# Altium PCB 8 BIT MCU CARD.PcbDoc
Units mm, origin at the board's own origin, x right, y up, seen from the top; angles counter-clockwise.
Board outline 152.4 x 101.6 mm, 2 copper layers (Top Layer, Bottom Layer); 24 components, 88 nets, 222 pads, 0 vias.
Unrouted connection lines stored in the file: 121.
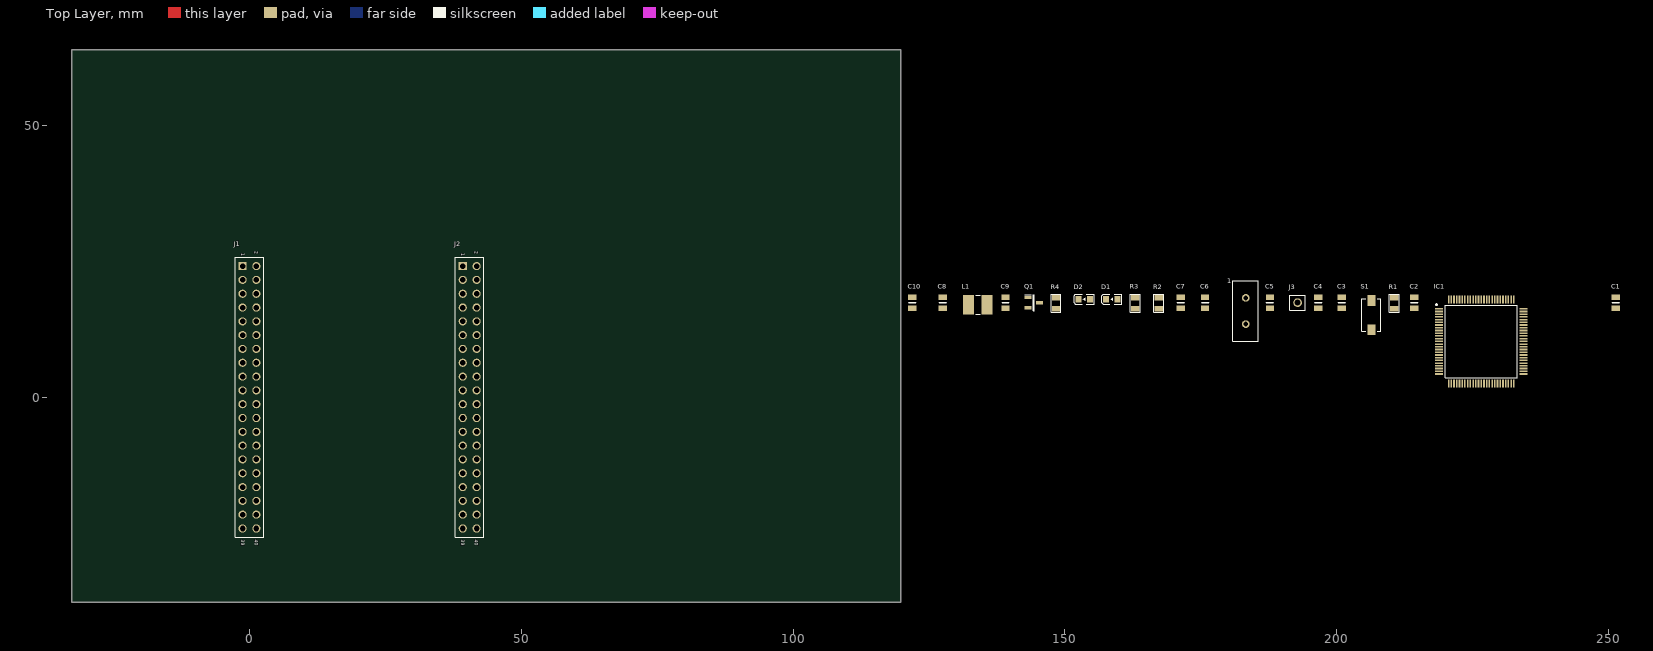
[diagram p0: Top Layer view]
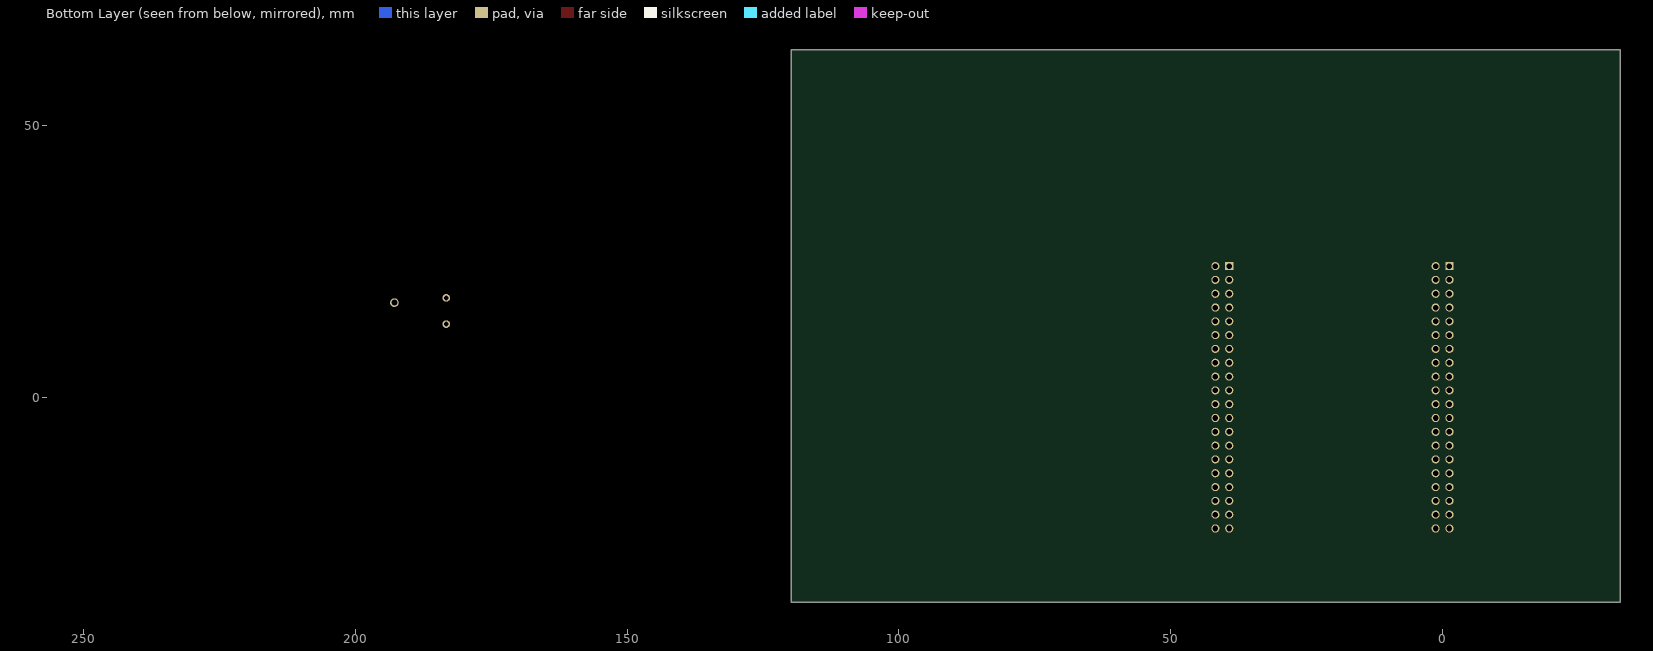
[diagram p1: Bottom Layer view, seen from below]

## Layer stack, top to bottom
Top Solder: solder mask 0.0102, Solder Resist, Dk 3.5
Top Layer: signal copper 0.0356
Dielectric 1: dielectric 0.32, FR-4, Dk 4.8
Bottom Layer: signal copper 0.0356
Bottom Solder: solder mask 0.0102, Solder Resist, Dk 3.5

## Board outline
-32.639,-37.719 119.761,-37.719 119.761,63.881 -32.639,63.881

## Design rules (kind name [scope] priority, off if disabled: settings)
Clearance [All] p1: gap=0.254 ignorepadtopadclearanceinfootprint=FALSE except(0: Arc-Hole Track-Hole SMDPad-Hole THPad-Hole Via-Hole Fill-Hole Poly-Hole Region-Hole Text-Hole)
PolygonConnect [All] p1: connectstyle=Relief reliefconductorwidth=0.254 reliefentries=4 polygonreliefangle="90 Angle" airgapwidth=0.254
RoomDefinition PIC18F97J94 [InComponentClass('PIC18F97J94')] p1: confinementstyle=ConfineIn formatcopy=TRUE lockcomponents=FALSE outline 120.904,-36.195 253.238,-36.195 253.238,21.717 120.904,21.717
RoutingVias [All] p1: holewidth=0.711 width=1.27 viastyle="Through Hole" minholewidth=0.711 minwidth=1.27 maxholewidth=0.711 maxwidth=1.27
SolderMaskExpansion [All] p1: expansion=0.102 istentingtop=FALSE
Width [All] p1: maxlimit=0.254 minlimit=0.254 preferedwidth=0.254
30 further rules are at their usual default settings.

## Components (designator, comment, footprint, x,y, rotation, side; value= is the part's Value field where it differs from the comment)
1 "" "Mini Crystal" 179.324,15.875 r90 top
C1 "0.10µF" SMD-0805C 251.333,17.399 r0 top
C2 "0.10µF" SMD-0805C 214.249,17.399 r0 top
C3 "10uF" SMD-0805C 200.914,17.399 r0 top value=0.10µF
C4 "0.10µF" SMD-0805C 196.596,17.399 r0 top
C5 "0.10µF" SMD-0805C 187.706,17.399 r0 top
C6 "18pF" SMD-0805C 175.768,17.399 r0 top value=0.10µF
C7 "18pF" SMD-0805C 171.323,17.399 r0 top value=0.10µF
C8 "0.10µF" SMD-0805C 127.508,17.399 r0 top
C9 "0.10µF" SMD-0805C 139.065,17.399 r0 top
C10 "0.10µF" SMD-0805C 121.92,17.399 r0 top
D1 "150080BS75000" WL-SMCW_0805 158.623,18.034 r0 top
D2 "150080BS75000" WL-SMCW_0805 153.543,18.034 r0 top
IC1 "PIC18F97J94-I-PF" QFP50P1600X1600X120-100N 226.568,10.287 r0 top
J1 "61304021821" 61304021821 0,0 r270 top
J2 "61304021821" 61304021821 40.513,0 r270 top
J3 "61300111121" 61300111121 192.786,17.399 r0 top
L1 "10uH, 0.95A" WE-LQ_1812 133.985,17.018 r0 top
Q1 "S12302DS Nchanel SMD SOT-23" SOT-23-3N 144.272,17.399 r0 top
R1 "10K" SMD-0805-RES 210.566,17.272 r0 top value=1k
R2 "240 ohm" SMD-0805-RES 167.259,17.272 r0 top value=1k
R3 "1k" SMD-0805-RES 162.941,17.272 r0 top
R4 "1k" SMD-0805-RES 148.336,17.272 r0 top
S1 "434113043826" 434113043826 206.375,15.113 r90 top

## Footprints (in the part's own frame and the unit in brackets; to place one, negate y for a bottom-side part, rotate by r counter-clockwise, add the part's x,y. Pads: shape width x height; smd on the part's side, far side on the other; paste and mask are expansions set on the pad)
61300111121 [mm] "Pin Header, pitch 2.54 mm, THT, Vertical, single row, 1p"
  round 1.6 hole 1.1: 1(0,0)
  silkscreen extent -1.42,-1.35 1.42,1.35, body extent -1.27,-1.27 1.27,1.27, height 8.57
61304021821 [mm] "Socket Header, Pitch 2.54 mm, THT, Vertical, dual row, 40p"
  rect 1.5x1.5 hole 1.02: 1(-24.13,-1.27)
  round 1.5 hole 1.02: 2(-24.13,1.27) 3(-21.59,-1.27) 4(-21.59,1.27) 5(-19.05,-1.27) 6(-19.05,1.27) 7(-16.51,-1.27) 8(-16.51,1.27) 9(-13.97,-1.27) 10(-13.97,1.27) 11(-11.43,-1.27) 12(-11.43,1.27) 13(-8.89,-1.27) 14(-8.89,1.27) 15(-6.35,-1.27) 16(-6.35,1.27) 17(-3.81,-1.27) 18(-3.81,1.27) 19(-1.27,-1.27) 20(-1.27,1.27) 21(1.27,-1.27) 22(1.27,1.27) 23(3.81,-1.27) 24(3.81,1.27) 25(6.35,-1.27) 26(6.35,1.27) 27(8.89,-1.27) 28(8.89,1.27) 29(11.43,-1.27) 30(11.43,1.27) 31(13.97,-1.27) 32(13.97,1.27) 33(16.51,-1.27) 34(16.51,1.27) 35(19.05,-1.27) 36(19.05,1.27) 37(21.59,-1.27) 38(21.59,1.27) 39(24.13,-1.27) 40(24.13,1.27)
  silkscreen extent -25.78,-2.62 25.78,2.62, body extent -25.65,-2.54 25.65,2.54, height 8.45
434113043826 [mm] "SMD Tact Switch, body 6x3.5mm"
  rect 2x1.5 smd: 1(-2.7,0) 2(2.7,0)
  silkscreen extent -3,-1.75 3,1.75, body extent -3.65,-1.75 3.65,1.75, height 4.3
"Mini Crystal" [mm] "THD, 2-Leads, Body 4x10mm, Pitch 5mm"
  round 1.4 hole 0.9: 1(-2.413,-3.937) 2(2.413,-3.937)
  silkscreen extent -5.59,-6.22 5.59,-1.52, body extent -5.61,-6.24 5.59,-1.64, height 3.75
QFP50P1600X1600X120-100N [mm]
  rect 1.475x0.3 smd: 1(-7.738,6) 2(-7.738,5.5) 3(-7.738,5) 4(-7.738,4.5) 5(-7.738,4) 6(-7.738,3.5) 7(-7.738,3) 8(-7.738,2.5) 9(-7.738,2) 10(-7.738,1.5) 11(-7.738,1) 12(-7.738,0.5) 13(-7.738,0) 14(-7.738,-0.5) 15(-7.738,-1) 16(-7.738,-1.5) 17(-7.738,-2) 18(-7.738,-2.5) 19(-7.738,-3) 20(-7.738,-3.5) 21(-7.738,-4) 22(-7.738,-4.5) 23(-7.738,-5) 24(-7.738,-5.5) 25(-7.738,-6) 51(7.738,-6) 52(7.738,-5.5) 53(7.738,-5) 54(7.738,-4.5) 55(7.738,-4) 56(7.738,-3.5) 57(7.738,-3) 58(7.738,-2.5) 59(7.738,-2) 60(7.738,-1.5) 61(7.738,-1) 62(7.738,-0.5) 63(7.738,0) 64(7.738,0.5) 65(7.738,1) 66(7.738,1.5) 67(7.738,2) 68(7.738,2.5) 69(7.738,3) 70(7.738,3.5) 71(7.738,4) 72(7.738,4.5) 73(7.738,5) 74(7.738,5.5) 75(7.738,6)
  rect 0.3x1.475 smd: 26(-6,-7.738) 27(-5.5,-7.738) 28(-5,-7.738) 29(-4.5,-7.738) 30(-4,-7.738) 31(-3.5,-7.738) 32(-3,-7.738) 33(-2.5,-7.738) 34(-2,-7.738) 35(-1.5,-7.738) 36(-1,-7.738) 37(-0.5,-7.738) 38(0,-7.738) 39(0.5,-7.738) 40(1,-7.738) 41(1.5,-7.738) 42(2,-7.738) 43(2.5,-7.738) 44(3,-7.738) 45(3.5,-7.738) 46(4,-7.738) 47(4.5,-7.738) 48(5,-7.738) 49(5.5,-7.738) 50(6,-7.738) 76(6,7.738) 77(5.5,7.738) 78(5,7.738) 79(4.5,7.738) 80(4,7.738) 81(3.5,7.738) 82(3,7.738) 83(2.5,7.738) 84(2,7.738) 85(1.5,7.738) 86(1,7.738) 87(0.5,7.738) 88(0,7.738) 89(-0.5,7.738) 90(-1,7.738) 91(-1.5,7.738) 92(-2,7.738) 93(-2.5,7.738) 94(-3,7.738) 95(-3.5,7.738) 96(-4,7.738) 97(-4.5,7.738) 98(-5,7.738) 99(-5.5,7.738) 100(-6,7.738)
  silkscreen extent -8.35,-6.65 6.65,6.87, body extent -8,-8 8,8, height 1.2
SMD-0805-RES [mil]
  rect 60x40 smd: 1(0,40) 2(0,-40)
  silkscreen extent -35,-65 35,65, body extent -24,-39 26,39, height 31
SMD-0805C [mil]
  rect 60x40 smd: 1(0,40) 2(0,-40)
  silkscreen extent -25,0 25,0, body extent -25,-39 25,39, height 35
SOT-23-3N [mm]
  rect 1.25x0.6 smd: 1(-1.05,0.95) 2(-1.05,-0.95) 3(1.05,0)
  silkscreen extent -1.68,-1.46 0.08,1.5, body extent -1.18,-1.46 1.18,1.46, height 1.12
WE-LQ_1812 [mm] "SMT Inductor, body 4.5x3.2mm"
  rect 2x3.6 smd: 1(-1.7,0) 2(1.7,0)
  silkscreen extent -0.4,-1.75 0.4,1.75, body extent -2.25,-1.6 2.25,1.6, height 2.59
WL-SMCW_0805 [mm] "SMD Mono-color Chip LED, body 2.0x1.25mm"
  rect 1.1x1.2 smd: 1(-1.05,0) 2(1.05,0)
  silkscreen extent -1.85,-0.88 1.85,0.88, body extent -1,-0.62 1,0.63, height 0.7

## Part data
1: library part "Mini Crystal", "9B-64.000MBBK-B", Freq. Stability="+/- 30 ppm", Frequency="4.096 MHz", Load Capacitance="18 pF", Manufacturer=Abracon, Operating Temp. Range="-40 to 85 degC", PartNumber=ABLS2-4.096MHZ-D4Y-T, Shunt Capacitance="7 pF Max.", ComponentLink1Description="Manufacturer URL", ComponentLink1URL=http://www.abracon.com/, ComponentLink2Description=Datasheet, ComponentLink2URL=http://www.abracon.com/Resonators/ABLS2.pdf, DatasheetVersion="Rev. 03.31.11", ESR="180 Ohm", Freq. Tolerance="+/- 30 ppm", Mounting Technology="Surface Mount", Operation Mode="Fundamental or 3rd Overtone", PackageDescription="2-Pin SMD, Body 11.4 x 4.7 mm, Height 3.3 mm", PackageReference=ABLS2-2, Packing="Tape and Reel", RoHS=TRUE
C1 C2 C3 C4 C5 C6 C7 C8 C9 C10: library part GCD21BR71H104KA01L, "CAP CER 0.1UF 50V X7R 0805", Digi-Key Part Number=490-11955-1-ND, Manufacturer="Murata Electronics North America", Operating Temperature="-55°C ~ 125°C", Package / Case="0805 (2012 Metric)", Ratings=AEC-Q200, Temperature Coefficient=X7R, Tolerance=±10%, Voltage=50V, @ qty=0, Applications=Automotive, Datasheets=http://www.murata.com/~/media/webrenewal/support/library/catalog/products/capacitor/mlcc/c03e.ashx, Factory Stock=0, Features=-, Height - Seated (Max)=-, Image=//media.digikey.com/Renders/Murata%20Renders/0805%28GxM6%29.jpg, Lead Spacing=-, Lead Style=-, Minimum Quantity=1, Mounting Type="Surface Mount, MLCC", Packaging="Cut Tape (CT)", Part Number=GCD21BR71H104KA01L, Part Status=Active, Quantity Available=157, Series=GCD, Size / Dimension="0.079\" L x 0.049\" W (2.00mm x 1.25mm)", Thickness (Max)="0.049\" (1.25mm)", Unit Price (USD)=0.24
D1 D2: "WL-SMCW SMD Mono-color Chip LED Waterclear, size 0805, Blue", Emitting Color=Blue, Forward Voltage="3.2 V", ComponentLink1Description=Manufacturer, ComponentLink1URL=http://www.we-online.de, ComponentLink2Description=Datasheet, ComponentLink2URL=http://katalog.we-online.de/led/datasheet/150080BS75000.pdf, Part Number=150080BS75000, Peak Wavelength="465 nm", Published Date="Jan 2017", Publisher="Wurth Elektronik", Size=0805, Viewing Angle=140°
IC1: "Integrated Circuit", Manufacturer_Name=Microchip, Mouser Part Number=579-PIC18F97J94-I/PF, Datasheet Link=http://ww1.microchip.com/downloads/en/DeviceDoc/30000575C.pdf, Height=1.2mm, Manufacturer_Part_Number=PIC18F97J94-I-PF, Mouser Price/Stock=http://www.mouser.com/Search/ProductDetail.aspx?qs=X98pPdo4MrvAjQYCsjfLPg%3d%3d
J1 J2: "WR-PHD Socket Header, THT, pitch 2.54mm, Dual Row, Vertical, 40pin", Contact Resistance=20mOhm, Operating Temperature="-40 to +125degC", Rated Current=3A, Withstanding Voltage=500VAC, Working Voltage=250VAC, ComponentLink1Description=Manufacturer, ComponentLink1URL=http://www.we-online.de, ComponentLink2Description=Datasheet, ComponentLink2URL=https://katalog.we-online.de/em/datasheet/6130xx21821.pdf, Gender=Female, Mounting Technology=THT, Orientation=Vertical, Packaging=Tray, Part Number=61304021821, Pin Number=40, Pitch=2.54mm, Published Date="June 2019", Publisher="Wurth Elektronik", Row Number=Dual
J3: "WR-PHD Pin Header, THT, pitch 2.54mm, Single Row, Vertical, 1pin", Contact Resistance=20mOhm, Operating Temperature="-40 to +105degC", Rated Current=3A, Withstanding Voltage=500VAC, Working Voltage=250VAC, ComponentLink1Description=Manufacturer, ComponentLink1URL=http://www.we-online.de, ComponentLink2Description=Datasheet, ComponentLink2URL=https://katalog.we-online.de/em/datasheet/6130xx11121.pdf, Gender=Male, Mounting Technology=THT, Orientation=Vertical, Packaging=Bag, Part Number=61300111121, Pin Number=1, Pitch=2.54mm, Published Date="June 2019", Publisher="Wurth Elektronik", Row Number=Single
L1: library part 744045100, "WE-LQ SMT Inductor, size 1812, 10uH, 0.95A", DC Resistance max.=0.3Ohm, Inductance=10uH, Manufacturer="Wurth Elektronik", Operating Temperature="-40 to +125degC", Rated Current=0.95A, Saturation Current=1.5A, Self Resonant Frequency=30MHz, ComponentLink1Description=Manufacturer, ComponentLink1URL=http://www.we-online.de, ComponentLink2Description=Datasheet, ComponentLink2URL=https://www.we-online.com/catalog/datasheet/744045100.pdf, Manufacturer Part Number=744045100, Mounting Technology=SMT, Packaging="Tape and Reel", Published Date="April 2020", Q-Factor=48, Size=1812
Q1: library part S12302DS, "S12302DS Nchanel SMD SOT-23. VDS MAX 20. 400Ma DI"
R1 R2 R3 R4: library part ERJ-6ENF1001V, "RES SMD 1K OHM 1% 1/8W 0805", Digi-Key Part Number=P1.00KCCT-ND, Manufacturer="Panasonic Electronic Components", Operating Temperature="-55°C ~ 155°C", Package / Case="0805 (2012 Metric)", Power (Watts)="0.125W, 1/8W", Supplier Device Package=0805, Temperature Coefficient=±100ppm/°C, Tolerance=±1%, @ qty=1500, Composition="Thick Film", Datasheets=http://industrial.panasonic.com/www-cgi/jvcr13pz.cgi?E+PZ+3+AOA0002+ERJ6ENF1001V+7+WW, Factory Stock=0, Failure Rate=-, Features="Automotive AEC-Q200", Height - Seated (Max)="0.028\" (0.70mm)", Image=//media.digikey.com/Renders/Panasonic%20Renders/ERJ-0805%20Pkg.jpg, Minimum Quantity=1, Number of Terminations=2, Packaging="Cut Tape (CT)", Part Number=ERJ-6ENF1001V, Part Status=Active, Quantity Available=12895103, Series=ERJ, Size / Dimension="0.079\" L x 0.049\" W (2.00mm x 1.25mm)", Unit Price (USD)=0.00729
S1: "WS-TASV J-Bend SMT Tact Switch 6x3.5mm, height 4.3mm, 260gf", Operating Temperature="-40 to +85degC", Rated Current=50mA, Rated Voltage=12VDC, ComponentLink1Description=Manufacturer, ComponentLink1URL=http://www.we-online.de, ComponentLink2Description=Datasheet, ComponentLink2URL=https://katalog.we-online.com/em/datasheet/434113043826.pdf, Contact Material="Stainless Steel", Contact Plating=Silver, Height=4.3mm, Mounting Technology=SMT, Operation Force=260gf, Packaging="Tape and Reel", Part Number=434113043826, Published Date="September 2019", Publisher="Wurth Elektronik", Terminal Material="Copper Alloy", Terminal Plating=Silver, Washable=No

## Nets (pads, with @x,y where several pads share a name; then routed paths per layer and width w, separated by ;. In a path a pad name is that pad's centre, name@x,y a point inside that pad or via, vN(x,y) a via of type N, cw(c..) or ccw(c..) an arc to the next point about the centre after c; other vN are vias at no path point)
3.3V: R2.2 R3.2
3V3_MCU: C1.2 C2.1 C5.2 C8.2 C9.2 IC1.5 IC1.28 IC1.40 IC1.59 IC1.88 J2.7 J2.33 L1.2 R1.2
GND: C1.1 C2.2 C3.2 C4.2 C5.1 C6.1 C7.1 C8.1 C9.1 C10.1 D2.1 IC1.14 IC1.32 IC1.35 IC1.39 IC1.64 IC1.87 J2.35 Q1.2
MCLR: IC1.11 J2.31 R1.1 S1.1
NetC3_1: C3.1 IC1.15
NetC4_1: C4.1 S1.2
NetC10_2: C10.2 IC1.31 L1.1
NetD1_1: D1.1 Q1.3
NetD1_2: D1.2 R2.1
NetD2_2: D2.2 R3.1
NetQ1_1: Q1.1 R4.1
osc1: 1.1 C7.2 IC1.61
osc2: 1.2 C6.2 IC1.62
PGC: IC1.65 J2.39
PGD: IC1.58 J2.37
RA0: IC1.37 J1.7
RA1: IC1.36 J1.5
RA2: IC1.34 J1.3
RA3: IC1.33 J1.1
RA4: IC1.43
RA5: IC1.42 J1.9
RB0: IC1.73 J2.40
RB1: IC1.72 J2.4
RB2: IC1.70 J1.11
RC2: IC1.53 J1.17
RC3: IC1.54 J2.1
RC4: IC1.56 J2.5
RC6: IC1.47 J1.13
RC7: IC1.48 J1.15
RD0: IC1.90 J2.22
RD1: IC1.86 J2.26
RD2: IC1.84 J2.30
RD3: IC1.83 J2.32
RD4: IC1.82 J2.34
RD5: IC1.81 J2.36
RD6: IC1.79 J2.2
RE0: IC1.4 J1.34
RE1: IC1.3 J1.36
RE2: IC1.98 J2.6
RE3: IC1.97 J2.8
RE4: IC1.95 J2.12
RE5: IC1.94 J2.14
RE6: IC1.93 J2.16
RE7: IC1.92 J2.18
RF2: IC1.23 J1.4
RF3/D-: IC1.22 J1.6
RF4/D+: IC1.20 J1.10
RF5: IC1.19 J1.12
RF6: IC1.18 J1.14
RF7: IC1.17 J1.16
RG0: IC1.6 J1.32
RG1: IC1.7 J1.30
RG2: IC1.8 J1.28
RG3: IC1.9 J1.26
RG4: IC1.12 J1.22
RG6: IC1.89 J2.24
RG7: IC1.96 J2.10
RH0: IC1.99 J2.21
RH1: IC1.100 J2.27
RH2: IC1.1 J1.40
RH3: IC1.2 J1.38
RH4: IC1.27 J1.25
RH5: IC1.26 J1.23
RH6: IC1.25 J1.21
RH7: IC1.24 J1.2
RJ0: IC1.77 R4.2
RJ1: IC1.76 J2.29
RJ2: IC1.75 J2.25
RJ3: IC1.74 J2.23
RJ4: IC1.49 J1.33
RJ5: IC1.50 J1.35
RJ6: IC1.51 J1.37
RJ7: IC1.52 J1.39
RK0: IC1.46 J1.19 J1.31
RK1: IC1.55 J2.3
RK2: IC1.60 J2.9
RK3: IC1.63 J2.11
RK6: IC1.80 J2.38
RK7: IC1.85 J2.28
RL0: IC1.91 J2.20
RL1: IC1.10 J1.24
RL2: IC1.13 J1.20
RL3: IC1.16 J1.18
RL4: IC1.21 J1.8
RL5: IC1.30 J1.27
RL6: IC1.38 J1.29
RL7: IC1.41
VBAT: IC1.29 J3.1
pads on no net: IC1.44 IC1.45 IC1.57 IC1.66 IC1.67 IC1.68 IC1.69 IC1.71 IC1.78 J2.13 J2.15 J2.17 J2.19

## Text inside footprints (layer, text, board x,y; h text height)
J1: Top Overlay "39" at -1.8,-26.16 h1.02 r270; Top Overlay "40" at 0.7,-26.16 h1.02 r270; Top Overlay "2" at 0.7,26.86 h1.02 r270; Top Overlay "1" at -1.8,26.46 h1.02 r270
J2: Top Overlay "39" at 38.713,-26.16 h1.02 r270; Top Overlay "40" at 41.213,-26.16 h1.02 r270; Top Overlay "2" at 41.213,26.86 h1.02 r270; Top Overlay "1" at 38.713,26.46 h1.02 r270